# Altium PCB Ultimate_Strat_PCB.PcbDoc (part 1 of 2)
Units mil, origin at the board's own origin, x right, y up, seen from the top; angles counter-clockwise.
Board outline 3685.72 x 1696.1 mil, 2 copper layers (Top Layer, Bottom Layer); 37 components, 56 nets, 274 pads, 347 vias.
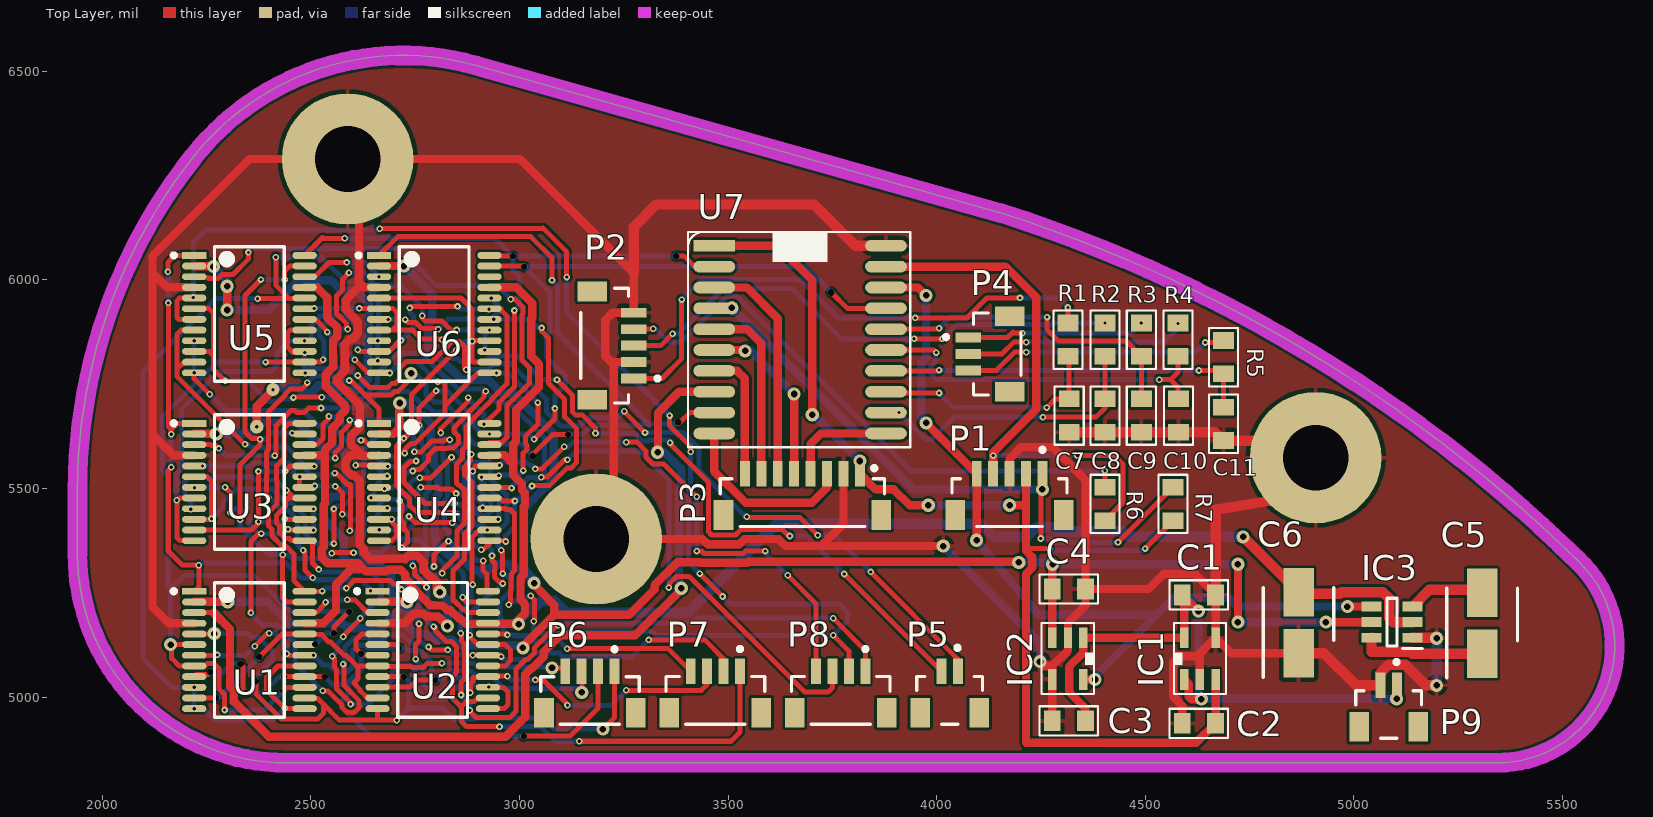
[diagram p0: Top Layer view]
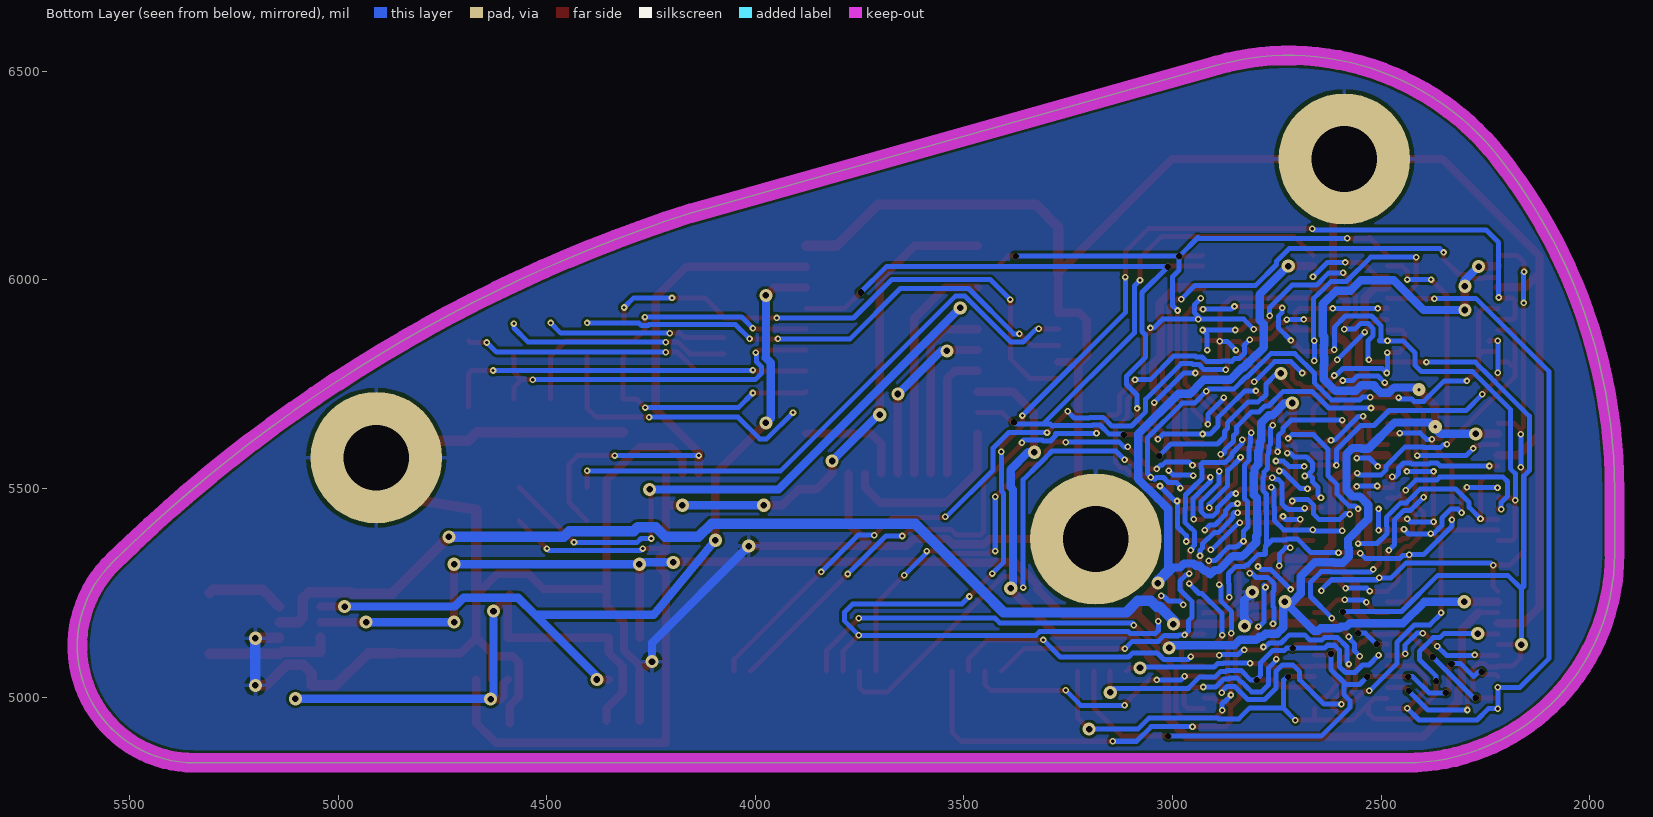
[diagram p1: Bottom Layer view, seen from below]

## Layer stack, top to bottom
Top Solder: solder mask 0.4, Solder Resist, Dk 3.5
Top Layer: signal copper 1.4
Dielectric 1: dielectric 12.6, FR-4, Dk 4.8
Bottom Layer: signal copper 1.4
Bottom Solder: solder mask 0.4, Solder Resist, Dk 3.5

## Board outline
1940,5342.34 1940,5496.22 cw(c3227.31,5496.22) 2218.14,6295.43 cw(c2720.84,5897.32) 2894.34,6514.66 4156.63,6159.89 cw(c3096.49,2841.75) 5540.09,5324.24 cw(c5345.68,5122.51) 5345.68,4842.34 2440,4842.34 cw(c2440,5342.34)

## Design rules (kind name [scope] priority, off if disabled: settings)
Clearance [All] p1: gap=6.3 ignorepadtopadclearanceinfootprint=FALSE
MinimumSolderMaskSliver [All] p1: minsoldermaskwidth=7.87
PolygonConnect [All] p1: connectstyle=Relief reliefconductorwidth=10 reliefentries=4 polygonreliefangle="90 Angle" airgapwidth=10
RoomDefinition "Microcontroller System" [InComponentClass('Microcontroller System')] p1: confinementstyle=ConfineIn formatcopy=TRUE lockcomponents=FALSE outline 3088.34,5371.18 4650.2,5371.18 4827.04,5845.01 4230.85,6103.69 3088.34,6296.18
RoomDefinition "Power System" [InComponentClass('Power System')] p2: confinementstyle=ConfineIn formatcopy=TRUE lockcomponents=FALSE outline 4155.37,5064.78 4157.01,4882 5460,4882 5460,5343.13 4155.37,5343.13
RoomDefinition "Coil Switching System" [InComponentClass('Coil Switching System')] p3: confinementstyle=ConfineIn formatcopy=TRUE lockcomponents=FALSE outline 2017.43,4879.14 4146.29,4879.14 4146.29,5358.15 3068.94,5358.15 3068.94,6407.26 2017.43,6407.26
RoutingVias [All] p1: holewidth=15.75 width=31.5 viastyle="Through Hole" minholewidth=7.87 minwidth=15.75 maxholewidth=50 maxwidth=50
SolderMaskExpansion [All] p1: expansion=4
UnRoutedNet [All] p1: checkbadconnections=TRUE
Width [All] p1: maxlimit=51.18 minlimit=6.3 preferedwidth=11.81
28 further rules are at their usual default settings.

## Classes and differential pairs
component class "Power System": C1 C2 C3 C4 C5 C6 IC1 IC2 IC3 P9
component class "Microcontroller System": C7 C8 C9 C10 C11 P1 P2 P3 P4 R1 R2 R3 R4 R5 R6 R7 U7
component class "Coil Switching System": P5 P6 P7 P8 U1 U2 U3 U4 U5 U6

## Components (designator, comment, footprint, x,y, rotation, side; value= is the part's Value field where it differs from the comment)
C1 "1uF" 0805C-GENERIC 4599,5245 r0 top
C2 "1uF" 0805C-GENERIC 4659,4937 r180 top
C3 "1uF" 0805C-GENERIC 4347,4943 r180 top
C4 "1uF" 0805C-GENERIC 4287,5259 r0 top
C5 "3.3uF" CAPAE430X550N 5308,5177 r90 top
C6 "3.3uF" CAPAE430X550N 4868,5178 r90 top
C7 "100nF" 0805C-TBD 4318,5645 r90 top
C8 "100nF" 0805C-TBD 4403.67,5705 r270 top
C9 "100nF" 0805C-TBD 4491,5705 r270 top
C10 "100nF" 0805C-TBD 4580,5705 r270 top
C11 "100nF" 0805C-TBD 4688,5685 r270 top
IC1 "MAX1726EUK33+T" SOT23-5 4594,5042.2 r90 top
IC2 "MAX1726EUK50+T" SOT23-5 4352,5142.2 r270 top
IC3 "LM2664M6X_NOPB" SOT95P280X145-6N 5092,5179.6 r180 top
P1 "PICKIT" JST_BM05B-SRSS-TB_LF_SN_0 4175,5466 r180 top
P2 "ROTARY ENCODER" JST_BM05B-SRSS-TB_LF_SN_0 3204.04,5842.63 r90 top
P3 "E-INK DISPLAY" JST_BM08B-SRSS-TB_LF_SN_0 3678.26,5466 r180 top
P4 "5 WAY SWITCH" JST_BM03B-SRSS-TB_LF_SN_0 4145.47,5822.55 r270 top
P5 "GUITAR OUTPUT JACK" JST_BM02B-SRSS-TB_LF_SN_0 4031.43,4992 r180 top
P6 "Header 4" JST_BM04B-SRSS-TB_LF_SN_0 3168.76,4991.53 r180 top
P7 "Header 4" JST_BM04B-SRSS-TB_LF_SN_0 3469.6,4992 r180 top
P8 "Header 4" JST_BM04B-SRSS-TB_LF_SN_0 3770.2,4992 r180 top
P9 "9V CONNECTOR" JST_BM02B-SRSS-TB_LF_SN_0 5084,4958 r180 top
R1 "10K" 0805R-10K 4315,5897 r270 top
R2 "10K" 0805R-10K 4403.67,5897 r270 top
R3 "10K" 0805R-10K 4491,5897 r270 top
R4 "10K" 0805R-10K 4579,5897 r270 top
R5 "10K" 0805R-10K 4688,5855 r270 top
R6 "10K" 0805R-10K 4403.67,5503 r270 top
R7 "10K" 0805R-10K 4567,5503 r270 top
U1 "MAX395CAG+" Maxim_Electronics_A24-2_IPC_C 2352.43,5112.84 r0 top locked
U2 "MAX395CAG+" Maxim_Electronics_A24-2_IPC_C 2792,5113 r0 top locked
U3 "MAX395CAG+" Maxim_Electronics_A24-2_IPC_C 2352.43,5515.55 r0 top locked
U4 "MAX395CAG+" Maxim_Electronics_A24-2_IPC_C 2795.57,5515.55 r0 top locked
U5 "MAX395CAG+" Maxim_Electronics_A24-2_IPC_C 2352.43,5918.25 r0 top locked
U6 "MAX395CAG+" Maxim_Electronics_A24-2_IPC_C 2795.57,5918.25 r0 top locked
U7 "PIC16LF1769-I/SO" SO20W 3467,6082 r0 top

## Footprints (in the part's own frame and the unit in brackets; to place one, negate y for a bottom-side part, rotate by r counter-clockwise, add the part's x,y. Pads: shape width x height; smd on the part's side, far side on the other; paste and mask are expansions set on the pad)
0805C-GENERIC [mil] "CAPACITOR 0805"
  rect 40x50 smd: 1(-10,0) 2(70,0)
  silkscreen extent -40,-35 100,35, body extent -11,-25 70,25, height 26
0805C-TBD [mil] "CAPACITOR 0805"
  rect 40x50 smd: 1(-10,0) 2(70,0)
  silkscreen extent -40,-35 100,35, body extent -11,-25 70,25, height 26
0805R-10K [mil] "RESISTOR 0805"
  rect 40x50 smd: 1(0,0) 2(80,0)
  silkscreen extent -30,-35 110,35, body extent -1,-25 80,25, height 27
CAPAE430X550N [mm]
  rect 2.95x1.85 smd: 1(-1.85,0) 2(1.85,0)
  silkscreen extent -3.32,-2.15 2.15,2.15, body extent -2.6,-2.25 2.6,2.25, height 5.5
JST_BM02B-SRSS-TB_LF_SN_0 [mm]
  rect 0.6x1.55 smd paste+0 mask+0: 1(-0.5,-1.775) 2(0.5,-1.775)
  rect 1.2x1.8 smd paste+0 mask+0: 3(-1.8,0.75) 4(1.8,0.75)
  silkscreen extent -2,-3.32 2,1.45, body extent -2.5,-2.65 2.5,1.75, height 0.25
JST_BM03B-SRSS-TB_LF_SN_0 [mm]
  rect 0.6x1.55 smd paste+0 mask+0: 1(-1,-1.775) 2(0,-1.775) 3(1,-1.775)
  rect 1.2x1.8 smd paste+0 mask+0: 4(-2.3,0.75) 5(2.3,0.75)
  silkscreen extent -2.5,-3.25 2.5,1.45, body extent -3,-2.65 3,1.75, height 0.25
JST_BM04B-SRSS-TB_LF_SN_0 [mm]
  rect 0.6x1.55 smd paste+0 mask+0: 1(-1.5,-1.775) 2(-0.5,-1.775) 3(0.5,-1.775) 4(1.5,-1.775)
  rect 1.2x1.8 smd paste+0 mask+0: 5(-2.8,0.75) 6(2.8,0.75)
  silkscreen extent -3,-3.25 3,1.45, body extent -3.5,-2.65 3.5,1.75, height 0.25
JST_BM05B-SRSS-TB_LF_SN_0 [mm]
  rect 0.6x1.55 smd paste+0 mask+0: 1(-2,-1.775) 2(-1,-1.775) 3(0,-1.775) 4(1,-1.775) 5(2,-1.775)
  rect 1.2x1.8 smd paste+0 mask+0: 6(-3.3,0.75) 7(3.3,0.75)
  silkscreen extent -3.5,-3.35 3.5,1.45, body extent -4,-2.65 4,1.75, height 0.25
JST_BM08B-SRSS-TB_LF_SN_0 [mm]
  rect 0.6x1.55 smd paste+0 mask+0: 1(-3.5,-1.775) 2(-2.5,-1.775) 3(-1.5,-1.775) 4(-0.5,-1.775) 5(0.5,-1.775) 6(1.5,-1.775) 7(2.5,-1.775) 8(3.5,-1.775)
  rect 1.2x1.8 smd paste+0 mask+0: 9(-4.8,0.75) 10(4.8,0.75)
  silkscreen extent -5,-2.22 5,1.45, body extent -5.5,-2.65 5.5,1.75, height 0.25
Maxim_Electronics_A24-2_IPC_C [mm]
  rect 1.482x0.418 smd paste+0 mask+0: 1(-3.364,3.575)
  oval 1.482x0.418 smd paste+0 mask+0: 2(-3.364,2.925) 3(-3.364,2.275) 4(-3.364,1.625) 5(-3.364,0.975) 6(-3.364,0.325) 7(-3.364,-0.325) 8(-3.364,-0.975) 9(-3.364,-1.625) 10(-3.364,-2.275) 11(-3.364,-2.925) 12(-3.364,-3.575) 13(3.364,-3.575) 14(3.364,-2.925) 15(3.364,-2.275) 16(3.364,-1.625) 17(3.364,-0.975) 18(3.364,-0.325) 19(3.364,0.325) 20(3.364,0.975) 21(3.364,1.625) 22(3.364,2.275) 23(3.364,2.925) 24(3.364,3.575)
  silkscreen extent -4.73,-4.1 2.12,4.1, body extent -4.2,-4.2 4.2,4.2, height 0.25
SO20W [mil]
  rect 100x28 smd: 1(0,0)
  oval 100x28 smd: 2(0,-50) 3(0,-100) 4(0,-150) 5(0,-200) 6(0,-250) 7(0,-300) 8(0,-350) 9(0,-400) 10(0,-450) 11(411.81,-450) 12(411.81,-400) 13(411.81,-350) 14(411.81,-300) 15(411.81,-250) 16(411.81,-200) 17(411.81,-150) 18(411.81,-100) 19(411.81,-50) 20(411.81,0)
  silkscreen extent -63,-483 470,33, body extent 5,-483 407,33, height 61
SOT23-5 [mil]
  rect 50x20 smd: 1(0,0) 2(0,-37) 3(0,-75) 4(100,-75) 5(100,0)
  silkscreen extent -35,-100 135,25, body extent 2,-95 98,20, height 52
SOT95P280X145-6N [mm]
  rect 1.2x0.6 smd: 1(-1.25,0.95) 2(-1.25,0) 3(-1.25,-0.95) 4(1.25,-0.95) 5(1.25,0) 6(1.25,0.95)
  silkscreen extent -1.85,-1.45 0.3,1.6, body extent -1.4,-1.45 1.4,1.45, height 1.45

## Part data
C1 C2 C3 C4: library part TMK212B7105KGHTR, "1µF ±10% 25V Ceramic Capacitor X7R 0805 _2012 Metric_", Package="2012 Taiyo Yuden", Digi-Key_Part_Number=587-6357-1-ND, Digi-Key_Purchase_URL=https://www.digikey.ca/product-detail/en/taiyo-yuden/TMK212B7105KGHTR/587-6357-1-ND/9949943?utm_source=snapeda&utm_medium=aggregator&utm_campaign=symbol, MF="Taiyo Yuden", MP=TMK212B7105KGHTR, SnapEDA_Link=https://www.snapeda.com/parts/TMK212B7105KGHTR/Taiyo%20Yuden/view-part/1813294/?ref=snap
C5 C6: library part 16SVP3R3M, "Capacitor Polarised", Manufacturer_Name=Panasonic, Mouser Part Number=667-16SVP3R3M, Arrow Part Number=16SVP3R3M, Arrow Price/Stock=https://www.arrow.com/en/products/16svp3r3m/panasonic, Datasheet Link=https://industrial.panasonic.com/cdbs/www-data/pdf/AAB8000/AAB8000C193.pdf, Height=5.5mm, Manufacturer_Part_Number=16SVP3R3M, Mouser Price/Stock=https://www.mouser.com/Search/Refine.aspx?Keyword=667-16SVP3R3M
C7 C8 C9 C10 C11: library part 0805C-100nF-25V-X7R-MUR, "CAPACITOR 0805 CERAMIC", Supplier Part Number 1=490-1673-1-ND, Supplier 1=Digi-Key
IC1: "Integrated Circuit", Manufacturer_Name="Maxim Integrated", Mouser Part Number=700-MAX1726EUK33T, Arrow Part Number=MAX1726EUK33+T, Datasheet Link=https://datasheets.maximintegrated.com/en/ds/MAX1725-MAX1726.pdf, Height=1.45mm, Manufacturer_Part_Number=MAX1726EUK33+T, Mouser Price/Stock=https://www.mouser.com/Search/Refine.aspx?Keyword=700-MAX1726EUK33T
IC2: "Integrated Circuit", Manufacturer_Name="Maxim Integrated", Mouser Part Number=700-MAX1726EUK50T, Arrow Part Number=MAX1726EUK50+T, Datasheet Link=http://componentsearchengine.com/Datasheets/1/MAX1726EUK50+T.pdf, Manufacturer_Part_Number=MAX1726EUK50+T, Mouser Price/Stock=https://www.mouser.co.uk/ProductDetail/Maxim-Integrated/MAX1726EUK50%2bT?qs=Jw2w9zrI6w%252Bbrdx6zz2S%2FQ%3D%3D
IC3: "Integrated Circuit", Arrow Part Number=LM2664M6X/NOPB, Manufacturer_Name="Texas Instruments", Mouser Part Number=926-LM2664M6X/NOPB, Arrow Price/Stock=https://www.arrow.com/en/products/lm2664m6xnopb/texas-instruments, Datasheet Link=https://componentsearchengine.com/Datasheets/2/LM2664M6X_NOPB.pdf, Height=1.45mm, Manufacturer_Part_Number=LM2664M6X/NOPB, Mouser Price/Stock=https://www.mouser.co.uk/ProductDetail/Texas-Instruments/LM2664M6X-NOPB?qs=X1J7HmVL2ZHEhyIijWLH%252BA%3D%3D
P1 P2: library part "Header 5", "Header, 5-Pin", LatestRevisionDate=17-Jul-2002, LatestRevisionNote="Re-released for DXP Platform.", Publisher="Altium Limited"
P3: library part "Header 8", "Header, 8-Pin", LatestRevisionDate=17-Jul-2002, LatestRevisionNote="Re-released for DXP Platform.", Publisher="Altium Limited"
P4: library part "Header 3", "Header, 3-Pin", LatestRevisionDate=17-Jul-2002, LatestRevisionNote="Re-released for DXP Platform.", Publisher="Altium Limited"
P5 P9: library part "Header 2", "Header, 2-Pin", LatestRevisionDate=17-Jul-2002, LatestRevisionNote="Re-released for DXP Platform.", Publisher="Altium Limited"
P6 P7 P8: "Header, 4-Pin", LatestRevisionDate=17-Jul-2002, LatestRevisionNote="Re-released for DXP Platform.", Publisher="Altium Limited"
R1 R2 R3 R4 R5 R6 R7: library part 0805R-10K, "RESISTOR 0805 1/4 WATT THIN FILM"
U1 U2 U3 U4 U5 U6: "No Description Available", Built_By=EMA_UL_Team, Copyright="Copyright (C) 2018 Accelerated Designs. All rights reserved", Manufacturer_Part_Number=MAX395CAG+, RefDes=RefDes, SourceLibrary=Maxim_2014-05-21, Type=DEV, Vendor="Maxim Integrated Products"
U7: "PIC PIC® XLP™ 16F Microcontroller IC 8-Bit 32MHz 14KB (8K x 14) FLASH 20-SOIC", Package="SOIC-20 Microchip", Availability=Warning, MF=Microchip, MP=PIC16LF1769-I/SO, Price=None, Purchase-URL=https://pricing.snapeda.com/search/part/PIC16LF1769-I/SO/?ref=eda, SnapEDA_Link=https://www.snapeda.com/parts/PIC16LF1769-I/SO/Microchip/view-part/880488/?ref=snap

## Free pads (board coordinates)
  round 314.96 hole 157.48: 1(2588,6290) 2(4909,5574) 3(3184,5379)

## Via types
v1: diameter 15.75, hole 7.87, Top Layer to Bottom Layer, 274 vias
v2: diameter 31.5, hole 15.75, Top Layer to Bottom Layer, 47 vias
v3: diameter 15.75, hole 15.75, Top Layer to Bottom Layer, 24 vias
v4: diameter 31.5, hole 7.87, Top Layer to Bottom Layer, 2 vias

## Nets (pads, with @x,y where several pads share a name; then routed paths per layer and width w, separated by ;. In a path a pad name is that pad's centre, name@x,y a point inside that pad or via, vN(x,y) a via of type N, cw(c..) or ccw(c..) an arc to the next point about the centre after c; other vN are vias at no path point)
Bridge_NEG: U4.10 U4.12 U4.13 U4.17 U6.7 U6.18 U6.20 | length 1607.7
  Top Layer w12: U4.12@2663.14,5374.8 2693.8,5374.8 2704.62,5385.62 2704.62,5408.89 2696.53,5416.98 2696.53,5417.06 2694,5419.59 v1(2694,5426) ; U6.7@2663.14,5905.46 v1(2685.54,5905.46) ; v1(2726,5905) 2732.83,5898.17 2750.96,5898.17 2765.42,5883.7 2803.3,5883.7 v1(2805,5882) ; v1(2735,5433) 2750,5418 v1(2839,5418) ; v1(2908,5353) 2913,5353 2928,5368 U4.13@2928,5374.8 2965.2,5374.8 v1(2967,5373) ; U4.17@2928,5477.16 2952.39,5477.16 2959.55,5470 v1(2989,5470) ; v1(3030,5506) 3030.83,5506.83 3071.72,5506.83 3113.68,5548.78 3123.31,5548.78 3137.17,5562.64 3137.17,5643.36 3108.48,5672.05 3108.48,5713.52 3069,5753 3069,5861 3053,5877 v1(3053,5885)
  Bottom Layer w12: v1(2685.54,5905.46) 2686,5905 v1(2726,5905) ; v1(2694,5426) 2730,5426 2735,5431 v1(2735,5433) ; v1(2805,5882) 2829,5906 v1(2938,5906) ; v1(2839,5418) 2839,5417.83 2839.83,5417 2840.83,5418 2905.83,5353 v1(2908,5353) ; v1(2932,5956) 2947.13,5940.87 2947.13,5921.64 2938,5912.52 v1(2938,5906) ; v1(2967,5373) 2967,5386.76 2987.92,5407.68 2987.92,5468.92 v1(2989,5470) 2994,5470 v1(3030,5506) ; v1(3053,5885) 3045,5885 3024,5906 v1(2938,5906)
Bridge_POS: U4.6 U4.8 U4.15 U4.19 U5.18 U6.12 U6.13 | length 1539
  Top Layer w12: U5.18@2484.86,5905.46 2510.79,5905.46 2539,5877.25 v1(2539,5875) ; v1(2605,5809) 2636.5,5777.5 U6.12@2663.14,5777.5 ; v1(2644,5478) 2662.3,5478 U4.8@2663.14,5477.16 ; U4.6@2663.14,5528.34 2662.8,5528 2663.8,5527 2666.8,5530 v1(2683,5530) ; U6.12@2682,5777 v1(2689,5777) ; v1@2724.79,5583.21 v1(2724.79,5585.05) 2724.79,5592.2 2727.83,5595.23 2727.88,5595.23 2727.88,5596.35 2739.7,5608.17 2749.75,5608.17 2821,5679.42 2821,5698 ; v1(2803.82,5756.05) 2814.95,5756.05 2821,5750 2821,5698 ; v1(2909,5527) 2926.66,5527 U4.19@2928,5528.34 ; U4.15@2928,5425.98 v1(2949,5426) ; v1(2945,5777) 2945,5775.02 2946.98,5777.01 2943.99,5780 2941.5,5777.5 U6.13@2928,5777.5 2900.5,5777.5 2821,5698 ; v1(3009,5543) 3009,5584.88 3018.3,5594.18 3018.3,5603.17 3014.83,5606.64 3014.83,5626.36 3029.64,5641.17 3031.17,5641.17 3044,5654 v1(3044,5706)
  Bottom Layer w12: v1(2539,5875) v1(2605,5809) ; v1(2644,5478) 2651.07,5485.07 2651.07,5502.79 2663.77,5515.48 2663.77,5524.77 2672,5533 ; v1(2683,5530) 2678.34,5530 2663.83,5544.52 2663.83,5561.36 2678.52,5576.05 2708.86,5576.05 2717.86,5585.05 v1(2724.79,5585.05) ; v1(2689,5777) 2716.05,5804.05 2755,5804.05 2799.18,5759.87 2800.35,5759.87 2804,5756.22 v1(2803.82,5756.05) ; v1(2909,5527) 2909,5517.38 2950.47,5475.91 2950.47,5445.12 2951.32,5444.27 2951.32,5428.32 v1(2949,5426) ; v1(2945,5777) 2972.98,5777 v1(3044,5706) ; v1(2950,5531) 2951.74,5532.74 2998.74,5532.74 v1(3009,5543)
FINAL_NEG: P5.2 U5.19 U6.6 U6.8 | length 2103.6
  Top Layer w12: U5.19@2484.86,5931.05 2487.81,5934 2490.04,5931.77 v1(2507.77,5931.77) ; v1(2615.77,5931.77) 2662.41,5931.77 U6.6@2663.14,5931.05 2696.95,5931.05 2705.83,5922.17 2705.83,5890.83 2694.87,5879.87 ; U6.8@2663.14,5879.87 2694.87,5879.87 ; v1(2815,5857) 2813.47,5858.53 2764.72,5858.53 2743.38,5879.87 2694.87,5879.87 ; v1(3090,5761) 3126.78,5724.22 3126.78,5683.99 3133.98,5676.79 3150.21,5676.79 3182.17,5644.83 v1(3182.17,5632.17) ; v1(3361,5610) 3361,5607 3453.36,5514.64 3453.36,5395.94 3460.57,5388.74 3518,5388.74 3530.56,5401.3 3630.45,5401.3 3645.55,5386.2 v1(3648.2,5386.2) ; v1(3778.63,5295) P5.2@4011.75,5061.88
  Bottom Layer w12: v1(2507.77,5931.77) v1(2615.77,5931.77) ; v1(2815,5857) 2828.7,5843.3 2828.7,5841.23 2827.83,5840.36 2827.83,5823.64 2839.64,5811.83 2850.77,5811.83 2857.83,5804.77 2863.24,5804.77 2863.64,5805.17 2880.36,5805.17 2880.76,5804.77 2918.36,5804.77 2929.06,5815.47 2943.32,5815.47 2945.44,5817.6 2996.75,5817.6 3053.35,5761 v1(3090,5761) ; v1(3182.17,5632.17) 3280,5632.17 3280.78,5631.39 3280.78,5625.69 3292.6,5613.87 3309.31,5613.87 3311.18,5615.75 3356.92,5615.75 3361,5611.66 v1(3361,5610) ; v1(3648.2,5386.2) 3687.43,5386.2 v1(3778.63,5295)
FINAL_POS: P5.1 U5.13 U5.15 U5.17 | length 2295
  Top Layer w12: U5.13@2484.86,5777.5 2484.36,5777 v1(2486,5777) ; U5.17@2484.86,5879.87 2450.87,5879.87 2443.38,5872.38 2443.38,5839.52 2456.91,5826 v1(2485,5826) ; v1(2612,5771) 2641,5742 2684.46,5742 2693.8,5751.35 2701.35,5751.35 2711.95,5761.95 2711.95,5787.62 2729.34,5805 2791.53,5805 2838.7,5852.17 2856.36,5852.17 2868.17,5840.36 2868.17,5823.64 2867.87,5823.34 2867.87,5789.13 v1(2872,5785) ; v1(3251,5685) 3251,5684 v1(3300.95,5634.05) ; v1(3545,5432) 3544.46,5432 3545.76,5430.7 3672.3,5430.7 v1(3715,5388) ; v1(3842,5300) 4051.12,5090.88 P5.1@4051.12,5061.88
  Bottom Layer w12: v1(2485,5826) 2485,5776 v1(2486,5777) 2496.9,5787.9 2591.63,5787.9 2608.53,5771 v1(2612,5771) ; v1(2872,5785) 2924.47,5785 2936.64,5797.17 2950.9,5797.17 2953.02,5799.3 2979.23,5799.3 3064.17,5714.36 3064.17,5684.3 3098.47,5650 3145.59,5650 3166.24,5670.65 3198.11,5670.65 3199.98,5668.77 3234.77,5668.77 v1(3251,5685) ; v1(3300.95,5634.05) 3393.08,5634.05 3430.47,5596.66 3430.47,5543.99 3542.46,5432 v1(3545,5432) ; v1(3715,5388) 3754,5388 v1(3842,5300)
GND: C1.2 C2.2 C3.2 C4.2 C6.1 C7.1 C8.2 C9.2 C10.2 C11.2 IC1.2 IC1.4 IC2.2 IC2.4 IC3.1 P1.3 P2.2 P2.5 P3.2 P9.2 pad.1 pad.2 pad.3 U1.4 U2.4 U3.4 U4.4 U5.4 U6.4 U7.20 | length 10859.5
  Top Layer w20: U1.4@2220,5177.23 2158.77,5177.23 2120,5216 2120,5630 ; U3.4@2220,5579.73 2170.27,5579.73 2120,5630 ; U5.4@2220,5982.23 2154.77,5982.23 2120,6017 ; 2617.66,5584.34 2610.17,5591.83 2609.99,5591.83 2595.83,5605.99 2595.83,5626.01 2617.66,5647.85 2617.66,5671.27 2617.66,5699.15 2561.83,5754.99 2561.83,5763.01 2581.99,5783.17 2581.99,5789.83 2580.83,5790.99 2580.83,5845.45 2593.21,5857.83 2598.01,5857.83 2612.17,5871.99 2612.17,5899.9 2583.37,5928.7 2583.37,5952.37 2620,5989 ; U2.4@2662.28,5177.23 2724.73,5177.23 2747.68,5200.17 2769.01,5200.17 2775.53,5193.65 2784.19,5193.65 2784.67,5193.17 2804.31,5193.17 2807.83,5189.65 2808.83,5189.65 2827,5171.49 v2(2827,5170) ; U4.4@2662.28,5579.73 2661.37,5578.83 2618.36,5578.83 2617.01,5580.17 2596.99,5580.17 2582.83,5566.01 2582.83,5545.99 2596.99,5531.83 2603.71,5531.83 2617.66,5517.88 2617.66,5389.4 2617.3,5389.04 2617.3,5365 2626.17,5356.13 2626.17,5347.56 2642.74,5331 2673.19,5331 2673.66,5331.47 2726.29,5331.47 2733.99,5339.17 2754.01,5339.17 2770.83,5322.36 2770.83,5302.99 2785.99,5287.83 2789.36,5287.83 2801.3,5275.89 2801.3,5259.05 v2(2808.83,5251.52) ; U6.4@2662.28,5982.23 2626.77,5982.23 2620,5989 ; P2.2@3273.92,5803.26 3219.74,5803.26 ; P3.2@3776.69,5535.88 3776.69,5415.5 3723.21,5362.03 ; v2(4016.03,5362.03) 3723.21,5362.03 ; P1.3@4175,5535.88 4175,5571 4203,5599 4278,5599 4357,5520 C4.2@4357,5259 ; v2(4248,5085) 4259,5074 4277,5074 ; C3.2@4277,4943 IC2.4@4277,5042.2 4277,5074 ; C2.2@4589,4937 4589,4979.41 4567.7,5000.71 4567.7,5083.5 4582,5097.8 4624.6,5097.8 4631,5104.2 ; IC1.2@4631,5042.2 4631,5104.2 ; C6.1@4868,5105.17 4706.03,5105.17 IC1.4@4669,5142.2 ; 2120,5630 2120,6017 ; 2120,6017 2120,6057 2353,6290 pad.1@2588,6290 ; pad.1@2588,6290 2615.17,6262.83 2615.17,6006.99 2614,6005.81 2614,5995 2620,5989 ; pad.1@2588,6290 3001,6290 3273.92,6017.08 P2.5@3273.92,5921.37 3223.37,5921.37 3206,5904 3206,5817 3219.74,5803.26 ; 3219.74,5803.26 3226.24,5796.76 3226.24,5421.24 pad.3@3184,5379 3438.77,5379 3451.33,5366.44 3527.24,5366.44 3539.8,5379 3621.22,5379 3638.19,5362.03 3723.21,5362.03 ; 4277,5074 4315,5112 IC2.2@4315,5142.2 4315,5177 4357,5219 C4.2@4357,5259 ; C4.2@4357,5259 4508,5259 4545,5296 4618,5296 C1.2@4669,5245 IC1.4@4669,5142.2 ; 4631,5104.2 IC1.4@4669,5142.2
  Top Layer w25: 3273.92,6017.08 3273.92,6126.92 3328,6181 3706,6181 3805,6082 U7.20@3878.81,6082 ; C7.1@4318,5635 C8.2@4403.67,5635 C9.2@4491,5635 C10.2@4580,5635 ; C10.2@4579,5634 C10.2@4580,5635 ; C1.2@4669,5245 4669,5448.83 4839.95,5477.32 pad.2@4909,5574 4868,5615 C11.2@4688,5615 4668,5635 C10.2@4580,5635 ; C6.1@4868,5105.17 4928.83,5105.17 5006.12,5027.88 5064,5027.88 5064,5057.11 5084.09,5077.19 5123.28,5077.19 5172.59,5027.88 v2(5198.88,5027.88) ; IC3.1@5141.21,5142.2 5197.8,5142.2 v2(5198.88,5141.12)
  Bottom Layer w20: v2(2808.83,5251.52) 2827.73,5232.63 2827.73,5188.57 v2@2818.17,5179.01 ; v2@2823,5169 2826,5169 v2(2827,5170) ; v2(4016.03,5362.03) 4248,5130.06 v2(4248,5085)
  Bottom Layer w25: v2(5198.88,5027.88) v2(5198.88,5141.12)
Middle_NEG: U2.17 U2.19 U3.6 U3.10 U6.5 U6.14 U6.16 | length 2627.4
  Top Layer w12: U3.10@2220,5425.98 2264.98,5425.98 2263.46,5427.5 v1(2261.48,5427.5) 2261.48,5517.52 2250.66,5528.34 U3.6@2220,5528.34 ; v1(2555,5368) 2554.83,5368.17 2554.83,5425.36 2555,5425.53 2555,5429.47 2554.83,5429.64 2554.83,5446.36 2555,5446.53 2555,5447 2553,5449 v1(2555,5451) ; U6.5@2663.14,5956.64 2663.23,5956.73 2859.8,5956.73 2886.52,5930.01 v1(2886.52,5853) v1@2886.52,5847.52 ; 2709.53,5602.81 2709.53,5606.53 ; v1(2844,5442) 2754.53,5442 2736.47,5460.06 2736.47,5475.06 2704.62,5506.91 2704.62,5576.69 2704.62,5593.4 2704.62,5601.62 2709.53,5606.53 ; v1(2848,5832) 2741.05,5725.05 2741.05,5666.38 2733.83,5659.16 2733.83,5630.83 v1(2723,5620) 2709.53,5606.53 ; v1(2881.05,5148.55) 2881.05,5144.79 2900.04,5125.8 U2.19@2924.43,5125.8 2965.5,5125.8 2979,5112.3 2979,5088.11 2965.5,5074.61 U2.17@2924.43,5074.61 ; U6.14@2928,5803.09 2927.91,5803 2889,5803 2886.17,5805.83 2886.17,5815.77 2886.47,5816.06 2886.47,5847.47 v1@2886.52,5847.52 ; U6.16@2928,5854.28 2893.28,5854.28 v1@2886.52,5847.52 ; v1(2934,5339) 2934,5327.47 2941.23,5320.24 2941.23,5305.76 2939.83,5304.36 2939.83,5287.64 2951.64,5275.83 2960,5275.83 v1(2960,5272)
  Bottom Layer w12: v1(2261.48,5427.5) 2288.71,5454.73 2288.71,5466.36 2321.52,5499.17 2406.36,5499.17 2418.17,5487.36 2418.17,5486.83 2439.53,5465.47 2452.94,5465.47 2487.44,5430.97 2487.44,5409.97 2485.83,5408.36 2485.83,5391.64 2509.47,5368 v1(2555,5368) ; v1(2555,5451) 2562.53,5458.53 2577.25,5458.53 2605.3,5486.58 2605.3,5508.77 2627.17,5530.64 2627.17,5594.17 2662,5629 2714,5629 v1(2723,5620) ; v1(2844,5442) 2852.53,5442 2855.23,5439.3 2855.23,5430.48 2860.17,5425.54 2860.17,5424.54 2890.48,5394.23 2900.3,5394.23 2902.44,5392.09 2902.44,5392.03 2914.25,5380.22 2915.31,5380.22 2928.53,5367 2928.53,5357.06 2934.17,5351.42 2934.17,5339.17 v1(2934,5339) ; v1(2848,5832) 2869,5853 v1(2886.52,5853) ; v1(2881.05,5148.55) 2881.05,5199.58 2929.8,5248.33 2936.33,5248.33 v1(2960,5272)
Middle_POS: U2.13 U2.15 U3.8 U3.12 U5.16 U6.10 U6.19 | length 2837.2
  Top Layer w12: v1(2178,5472.04) v1@2178.52,5471.52 ; U3.12@2220,5374.8 2186.2,5374.8 2178.52,5382.48 v1@2178.52,5471.52 ; U3.8@2220,5477.16 2184.16,5477.16 v1@2178.52,5471.52 ; v1(2484.59,5854) U5.16@2484.86,5854.28 ; v1(2612,5833) 2616.31,5828.68 U6.10@2663.14,5828.68 2687.53,5828.68 2716,5857.16 v1(2716,5855) ; v1(2737,5933) 2740.56,5936.56 v1(2851.44,5936.56) ; v1(2751,5091) 2751,5126 2759,5134 v1(2759,5176) ; v1(2815,5297) 2811.96,5300.04 2849.92,5338.01 2849.92,5398.46 2868.17,5416.71 2868.17,5496.36 2856.36,5508.17 2853.71,5508.17 2849.4,5512.48 2849.4,5557.59 2849.92,5558.11 2849.92,5559.39 2857.17,5566.64 2857.17,5567.93 2863.7,5574.46 2863.7,5593.29 2871.47,5601.06 2871.47,5648.19 2886.52,5663.23 2886.52,5664.8 2890.83,5669.1 2890.83,5669.36 2902.64,5681.17 2902.64,5681.36 2932.88,5711.59 2932.88,5714.23 2969.48,5750.83 2969.48,5913.96 2957.45,5925.98 2955.4,5925.98 2955.4,5930.28 2956.17,5931.05 U6.19@2928,5931.05 v1(2926.95,5930) ; U2.13@2924.43,4972.25 2963.25,4972.25 2973,4982 2973,5012 2961.57,5023.43 U2.15@2924.43,5023.43 2923.86,5024 v1(2926,5024)
  Bottom Layer w12: v1(2178,5472.04) 2178,5535.47 2190,5547.47 2190,5690 2280,5780 2403,5780 2418,5795 2418,5825 2447,5854 v1(2484.59,5854) 2504,5854 2504,5855.59 2500.53,5859.06 2500.53,5890.94 2523.06,5913.47 2585.06,5913.47 2612,5886.53 v1(2612,5833) ; v1(2716,5855) 2746.17,5885.17 2746.17,5913.36 2737,5922.53 v1(2737,5933) ; v1(2751,5091) 2751,5088.54 2770.35,5069.2 2770.35,5030.8 2770.35,5028.85 2786.78,5012.42 2810.01,5012.42 2820.53,5022.94 2834.25,5036.65 2836.2,5036.65 2845.02,5045.47 2862.24,5045.47 2864.28,5043.43 2876.98,5043.43 2890.23,5030.17 2890.36,5030.17 2896.53,5024 v1(2926,5024) ; v1(2759,5176) 2757,5178 2757,5215.15 2758.64,5216.79 2758.64,5252.83 2756.83,5254.64 2756.83,5272.36 2771.64,5287.17 2799.7,5287.17 2809.53,5297 v1(2815,5297) ; v1(2851.44,5936.56) 2858,5930 v1(2926.95,5930)
Neck_NEG: U1.10 U1.12 U1.13 U1.17 U5.20 U6.9 U6.11 | length 2389.9
  Top Layer w12: v1(2372,5955) 2448,5955 ; v1(2415.7,6054.7) 2415.7,5987.3 2448,5955 ; U1.13@2484.86,4972.09 2437.91,4972.09 v1(2437,4973) 2393.47,5016.53 2393.47,5047 2420.93,5074.46 U1.17@2484.86,5074.46 ; U5.20@2484.86,5956.64 2483.22,5955 2448,5955 ; v1(2660,5806) 2660.23,5806 U6.11@2663.14,5803.09
  Bottom Layer w12: v1(2372,5955) 2370.95,5956.05 2273.05,5956.05 2097,5780 2097,5093 2166.72,5023.28 v1(2220,5023.28) v1(2220,4972.09) 2242.91,4972.09 2270,4945 2409,4945 v1(2437,4973) ; v1(2415.7,6054.7) 2524.77,6054.7 2582.64,5996.83 2619.72,5996.83 2647.2,5969.35 2647.65,5969.35 2662.24,5954.76 2662.24,5856.19 v1(2660.03,5853.97) v1(2660,5806)
Neck_POS: U1.6 U1.8 U1.15 U1.19 U5.14 U6.15 U6.17 | length 2931.5
  Top Layer w12: v2(2163.36,5125.64) U1.6@2220,5125.64 ; v2@2166,5112 2166,5093 2184.54,5074.46 U1.8@2220,5074.46 2222.23,5072.23 2242.7,5072.23 2250.64,5080.17 2267.35,5080.17 2279.17,5068.36 2279.17,5019.85 2292.92,5006.1 v1(2292.92,4968.92) ; v1(2391.09,5803.09) U5.14@2484.86,5803.09 2523.09,5803.09 v1(2529,5809) ; v3(2434,5015) 2435,5015 2443.28,5023.28 U1.15@2484.86,5023.28 ; U1.19@2484.86,5125.64 2486.22,5127 v3(2510,5127) ; v3(2555,5153) 2555,5168 v3(2592,5205) ; v1(2588,5882) 2585.47,5884.53 2585.47,5895.06 2561.07,5919.47 2561.07,5961.61 2576,5976.54 2576,6002 v1(2591,6017) ; v1(2767,5914) 2767,5908 2773,5902 2793.07,5902 2793.24,5902.17 2813.36,5902.17 2835.53,5880 v1(2849.82,5880) ; v1(2927.87,5880) U6.17@2928,5879.87
  Bottom Layer w12: v2(2163.36,5125.64) 2163.36,5259.36 ; v1(2292.92,4968.92) 2387.92,4968.92 v3(2434,5015) ; v1(2391.09,5803.09) 2274.09,5803.09 2240.17,5769.17 2228.36,5757.33 2144.44,5673.44 2144.44,5543.03 2157.83,5529.64 2157.83,5264.9 2163.36,5259.36 ; v3(2510,5127) 2511.65,5127 2537.65,5153 v3(2555,5153) ; v1(2529,5809) 2531.83,5811.83 2531.83,5853.64 2518.83,5866.64 2518.83,5883.36 2530.64,5895.17 2549.83,5895.17 2563,5882 v1(2588,5882) ; v1(2591,6017) 2625.43,6017 2654.78,5987.65 2713.35,5987.65 2767,5934 v1(2767,5914) ; v3@2594,5205 v3(2592,5205) 2450.95,5205 2363.95,5292 2196,5292 2163.36,5259.36 ; v1(2849.82,5880) v1(2927.87,5880) 2928,5879.87 2916.94,5868.8 v1(2916.94,5831.87)
NetC2_1: C2.1 IC1.3 P1.2 P3.1 R7.2 U7.1 | length 2835.3
  Top Layer w12: 4214.37,5350.95 4219.42,5356 v1(4270,5356) ; v1(4500,5356) R7.2@4567,5423
  Top Layer w20: U7.1@3467,6082 3619,6082 3702,5999 v2(3702,5677) ; v2(3816.06,5565.94) P3.1@3816.06,5535.88 3853.94,5498 3897,5498 3935,5460 v2(3980,5460) ; v2(4175,5460) 4212.37,5460 4214.37,5462 ; P1.2@4214.37,5535.88 4214.37,5462 ; IC1.3@4669,5042.2 C2.1@4669,4937 4622.63,4890.63 4214.37,4890.63 4214.37,5295.05 4229.05,5309.73 4229.05,5336.27 4214.37,5350.95 4214.37,5462
  Bottom Layer w12: v1(4270,5356) 4275.17,5350.83 4494.83,5350.83 v1(4500,5356)
  Bottom Layer w20: v2(3702,5677) 3705,5677 v2(3816.06,5565.94) ; v2(3980,5460) v2(4175,5460)
NetC4_1: C4.1 IC2.3 IC3.5 U1.2 U2.2 U3.2 U4.2 U5.2 U6.2 | length 7458.8
  Top Layer w20: U1.2@2220,5228.41 v2(2300.59,5228.41) ; U3.2@2220,5630.91 2220.09,5631 v2(2273,5631) ; U5.2@2220,6033.41 2220.41,6033 2266,6033 v2(2266,6032) ; v2(2299,5928) v2(2299,5985) ; v4(2370,5648) 2370,5697.03 2409.97,5737 v4(2409,5737) ; U2.2@2662.28,5228.41 v2(2730.59,5228.41) ; U6.2@2662.28,6033.41 v2(2722.59,6033.41) ; U4.2@2663.14,5630.7 2698.01,5630.7 2708.62,5641.32 2708.62,5643.8 2710.99,5646.17 2711.53,5646.17 2711.53,5703.53 v2(2713,5705) ; v2(3008,5118) 3008,5118.22 3006.22,5120 3007.11,5120.89 3083.22,5197 3263,5197 3323.93,5257.93 3323.93,5268.13 3378.97,5323.17 3431.53,5323.17 3432.86,5321.84 3545.71,5321.84 3548.04,5324.17 4195.83,5324.17 v2(4197,5323) ; v2(3035,5273) 3035,5269 3036.83,5267.17 3037.01,5267.17 3051.17,5253.01 3051.17,5252.83 3083.22,5220.78 3083.22,5205.22 ; IC2.3@4277,5142.2 C4.1@4277,5259 4277,5317 v2(4278.4,5318.4) ; v2(4722.6,5179.6) v2(4722.6,5318.4) ; v2(4933.4,5179.6) IC3.5@5042.79,5179.6
  Bottom Layer w20: v2(2266,6032) 2301,5997 2301,5983 v2(2299,5985) ; v2(2273,5631) 2356.81,5631 2370,5644.19 v4(2370,5648) 2373.81,5648 2383.99,5658.17 2467.83,5658.17 2530.7,5595.3 2546.11,5595.3 2547.99,5597.17 2568.01,5597.17 2583,5582.19 2583,5566.19 2582.83,5566.01 2582.83,5545.99 2583,5545.81 2583,5495.81 2568.01,5480.83 2550.64,5480.83 2530.83,5461.01 2530.83,5426.36 2579.17,5378.01 2579.17,5357.99 2577.83,5356.64 2577.83,5335.99 2591.99,5321.83 2612.01,5321.83 2613.01,5322.83 2659.17,5322.83 2692.83,5289.17 2692.83,5247.99 2712.4,5228.41 v2(2730.59,5228.41) ; v2(2299,5928) 2398.19,5928 2469.19,5999 2548.94,5999 2573.41,5974.53 2607.2,5974.53 2639.94,5941.78 2639.94,5868.07 2635.86,5863.98 2635.86,5843.96 2637,5842.81 2637,5817.19 2635.83,5816.01 2635.83,5795.99 2637,5794.81 2637,5761.81 2609.19,5734 2560.94,5734 2547.64,5747.3 2516.36,5747.3 2515.17,5746.11 2515.17,5743.99 2501.01,5729.83 2480.99,5729.83 2468.64,5742.17 2414.17,5742.17 v4(2409,5737) ; v2(2300.59,5228.41) 2396,5228.41 2447.24,5177.17 2574.51,5177.17 2582.73,5168.95 2595.98,5168.95 2600.16,5164.77 2645.17,5164.77 2651.22,5158.73 2660.91,5158.73 v2(2730.59,5228.41) ; v2(2713,5705) 2731.19,5705 2760.67,5675.52 2769.36,5675.52 2786.83,5658.05 2786.83,5615.24 2790.53,5611.54 2790.53,5599.41 2792.4,5597.53 2792.4,5591.58 2794.53,5589.46 2794.53,5557.41 2803.47,5548.46 2803.47,5538.01 2805.47,5536.01 2805.47,5485.41 2797.53,5477.46 2797.53,5436.59 2796.53,5435.59 2796.53,5389.16 2799.53,5386.16 2799.53,5369.89 2829.95,5339.47 2832.59,5339.47 2834.36,5337.7 2855.76,5337.7 2888.76,5304.7 2898.77,5304.7 2909.64,5293.83 2918.64,5302.83 2923.01,5302.83 2935.01,5314.83 2944.01,5314.83 2949.36,5320.17 2971.89,5320.17 2981.52,5310.54 2997.46,5310.54 v2(3035,5273) 3035,5282.24 3010.22,5307.02 3010.22,5450.98 3035,5475.76 3035,5475.81 3082.35,5523.16 3082.35,5630.72 2986.24,5726.83 2957.99,5726.83 2943.83,5740.99 2943.83,5742.36 2925.66,5760.53 2862.06,5760.53 2833.06,5789.53 2830.41,5789.53 2799.34,5820.59 2798.52,5820.59 2780.83,5838.29 2780.83,5893.64 2791.17,5903.99 2791.17,5964.83 v2(2722.59,6033.41) ; v2(3008,5118) 3008,5120 3003.62,5124.38 2877.78,5124.38 2851.81,5124.38 2839.01,5137.17 2799.01,5137.17 2792.01,5144.17 2784.64,5144.17 2776.99,5151.83 2748.99,5151.83 2734.7,5166.11 2734.7,5224.3 v2(2730.59,5228.41) ; v2(4197,5323) 4273.8,5323 v2(4278.4,5318.4) v2(4722.6,5318.4) ; v2(4722.6,5179.6) v2(4933.4,5179.6)
NetC5_1: C5.1 IC3.6 | length 300.7
  Top Layer w25: IC3.6@5042.79,5142.2 5042.79,5108.49 5136.25,5108.49 5140.57,5104.17 C5.1@5308,5104.17
NetC5_2: C5.2 IC3.3 | length 186.3
  Top Layer w25: IC3.3@5141.21,5217 5181.21,5257 5300.83,5257 C5.2@5308,5249.83
NetC6_2: C6.2 IC3.2 U1.21 U2.21 U3.21 U4.21 U5.21 U6.21 | length 5020.1
  Top Layer w20: U1.21@2484.86,5177.23 2530.23,5177.23 2559.95,5206.95 2559.95,5270.14 2597.81,5308 2625,5308 ; U3.21@2484.86,5579.73 2531.46,5579.73 2533.83,5577.36 ; U5.21@2484.86,5982.23 2514.91,5982.23 2538.77,5958.37 2538.77,5910.23 2563.17,5885.83 2563.17,5864.99 2553,5854.81 2553,5819.19 2553.17,5819.01 2553.17,5791.55 2535.53,5773.91 2535.53,5744.09 2582.17,5697.45 2582.17,5687.36 2568.83,5674.01 2568.83,5662.08 2551.23,5644.49 2551.23,5610.69 2533.83,5593.29 2533.83,5577.36 ; U4.21@2927.14,5579.73 2927.58,5580.17 2964.01,5580.17 2984.83,5559.36 ; U6.21@2927.14,5982.23 2992.39,5982.23 3030.25,5944.37 3030.25,5909.19 3028.38,5907.31 3028.38,5816.57 3046.7,5798.24 3046.7,5742.89 2991.78,5687.96 2991.78,5612.97 2984.83,5606.01 2984.83,5559.36 ; 2533.83,5577.36 2532.83,5576.36 2532.83,5522.99 2533.83,5521.99 2533.83,5464.01 2530.34,5460.53 2530.34,5359.53 2525.83,5355.01 2525.83,5334.99 2539.99,5320.83 2612.17,5320.83 2625,5308 ; 2625,5308 2631.47,5301.53 2680.91,5301.53 2684.55,5305.17 2715.01,5305.17 2726.23,5293.96 2726.23,5284.51 2741.17,5269.57 2741.17,5264.64 2766.99,5238.83 2767.99,5238.83 2786.86,5219.95 2795.08,5219.95 2795.56,5219.47 2815.21,5219.47 2818.73,5215.95 2819.73,5215.95 2827.73,5207.95 2834.98,5207.95 2855.71,5187.23 2859.77,5187.23 2872,5175 2892.41,5175 2893.32,5175.91 2997.09,5175.91 v2(2998,5175) 2998,5184.94 3013.33,5200.26 3013.33,5222.49 3002.47,5233.34 3002.47,5276.47 3002.95,5276.95 3002.95,5286.27 3010.22,5293.54 3010.22,5457.03 3013.17,5459.99 3013.17,5488.64 3005.83,5495.99 3005.83,5511.17 2984.83,5532.17 2984.83,5559.36
  Top Layer w25: v2(4734.83,5384) C6.2@4868,5250.83 4871.22,5247.61 4966.75,5247.61 4970.69,5251.55 5070.26,5251.55 5085.21,5236.6 5085.21,5189.79 5095.4,5179.6 IC3.2@5141.21,5179.6
  Bottom Layer w25: v2(2998,5175) 2998,5179.72 2996,5181.72 3030.61,5216.33 3038.05,5216.33 3052.39,5230.67 3083.03,5230.67 3110.98,5202.72 3404.12,5202.72 3458.7,5257.3 3458.7,5257.42 3616.83,5415.55 4105.31,5415.55 4136.86,5384 4215.93,5384 4238.78,5406.85 4282.75,5406.85 4291.93,5397.67 4446.05,5397.67 4459.72,5384 v2(4734.83,5384)
NetC7_2: C7.2 R1.2 U7.13 | length 566.9
  Top Layer w12: U7.13@3878.81,5732 3881.81,5729 v1(4006,5729) ; v1(4264,5694) 4285,5715 C7.2@4318,5715 4318,5814 R1.2@4315,5817
  Bottom Layer w12: v1(4006,5729) 4041,5694 v1(4264,5694)
NetC8_1: C8.1 R2.2 U7.12 | length 677.6
  Top Layer w12: U7.12@3907,5682 v1(3910,5682) ; v1(4255,5671) 4382,5671 4403.67,5692.67 C8.1@4403.67,5715 R2.2@4403.67,5817
  Bottom Layer w12: v1(3910,5682) 3973,5619 3990,5619 4042,5671 v1(4255,5671)
NetC9_1: C9.1 R3.2 U7.16 | length 782.7
  Top Layer w12: U7.16@3878.81,5882 4004,5882 v1(4006,5884) ; v1(4265,5911) 4265,5881 4292,5854 4454,5854 R3.2@4491,5817 C9.1@4491,5715
  Bottom Layer w12: v1(4006,5884) 4033,5911 v1(4265,5911)
NetC10_1: C10.1 R4.2 U7.15 | length 878.5
  Top Layer w12: U7.15@3878.81,5832 3993,5832 v1(3999,5826) ; v1(4534,5761) 4561,5761 ; C10.1@4580,5715 4579,5716 4579,5743 4561,5761 ; R4.2@4580,5816 R4.2@4579,5817 4579,5779 4561,5761
  Bottom Layer w12: v1(3999,5826) 3997.3,5824.3 3997.3,5803.83 3985.83,5792.36 3985.83,5775.64 4000.47,5761 v1(4534,5761)
NetC11_1: C11.1 R5.2 U7.14 | length 893.7
  Top Layer w12: U7.14@3878.81,5782 4004,5782 v1(4006,5784) ; v1(4629,5783) 4680,5783 R5.2@4688,5775 C11.1@4688,5695
  Bottom Layer w12: v1(4006,5784) 4007,5783 v1(4629,5783)
NetIC2_5: IC2.5 IC3.4 P1.5 U7.18 | length 2053.2
  Top Layer w20: U7.18@3878.81,5982 3956,5982 v2(3975,5963) ; v2(3975,5657.14) P1.5@4096.26,5535.88 v2(4096,5376) ; IC2.5@4352,5042.2 4353.2,5041 4354.2,5042 v2(4380,5042) ; v2(4985,5217) IC3.4@5042.79,5217
  Bottom Layer w20: v2(3975,5657.14) 3963.53,5668.61 3963.53,5801.59 3975,5813.07 3975,5815.81 3974.83,5815.99 3974.83,5962.83 v2(3975,5963) ; v2(4096,5376) 4243.5,5197.5 4528.5,5197.5 ; v2(4380,5042) 4380,5049 4528.5,5197.5 ; v2(4985,5217) 4721,5217 4699.95,5238.05 4569.05,5238.05 4528.5,5197.5
NetP1_1: P1.1 R7.1 U7.4 | length 1426.3
  Top Layer w12: v1(4249.83,5380.17) 4249.83,5493.83 v2(4253.74,5497.74) ; v1(4435,5371) R7.1@4567,5503
  Top Layer w20: v2(3509,5933) U7.4@3509,5939
  Bottom Layer w12: 4007,5499 4008.05,5497.95 ; v1(4249.83,5380.17) 4274.36,5380.17 4283.53,5371 v1(4435,5371)
  Bottom Layer w20: v2(3509,5933) 3944.26,5497.74 4007,5497.74 ; 4008.05,5497.74 v2(4253.74,5497.74)